# Altium PCB LoggerBoard.PcbDoc
Units mm, origin at the board's own origin, x right, y up, seen from the top; angles counter-clockwise.
Board outline 112.88 x 192.86 mm, 2 copper layers (Top Layer, Bottom Layer); 30 components, 35 nets, 110 pads, 0 vias.
Unrouted connection lines stored in the file: 45.
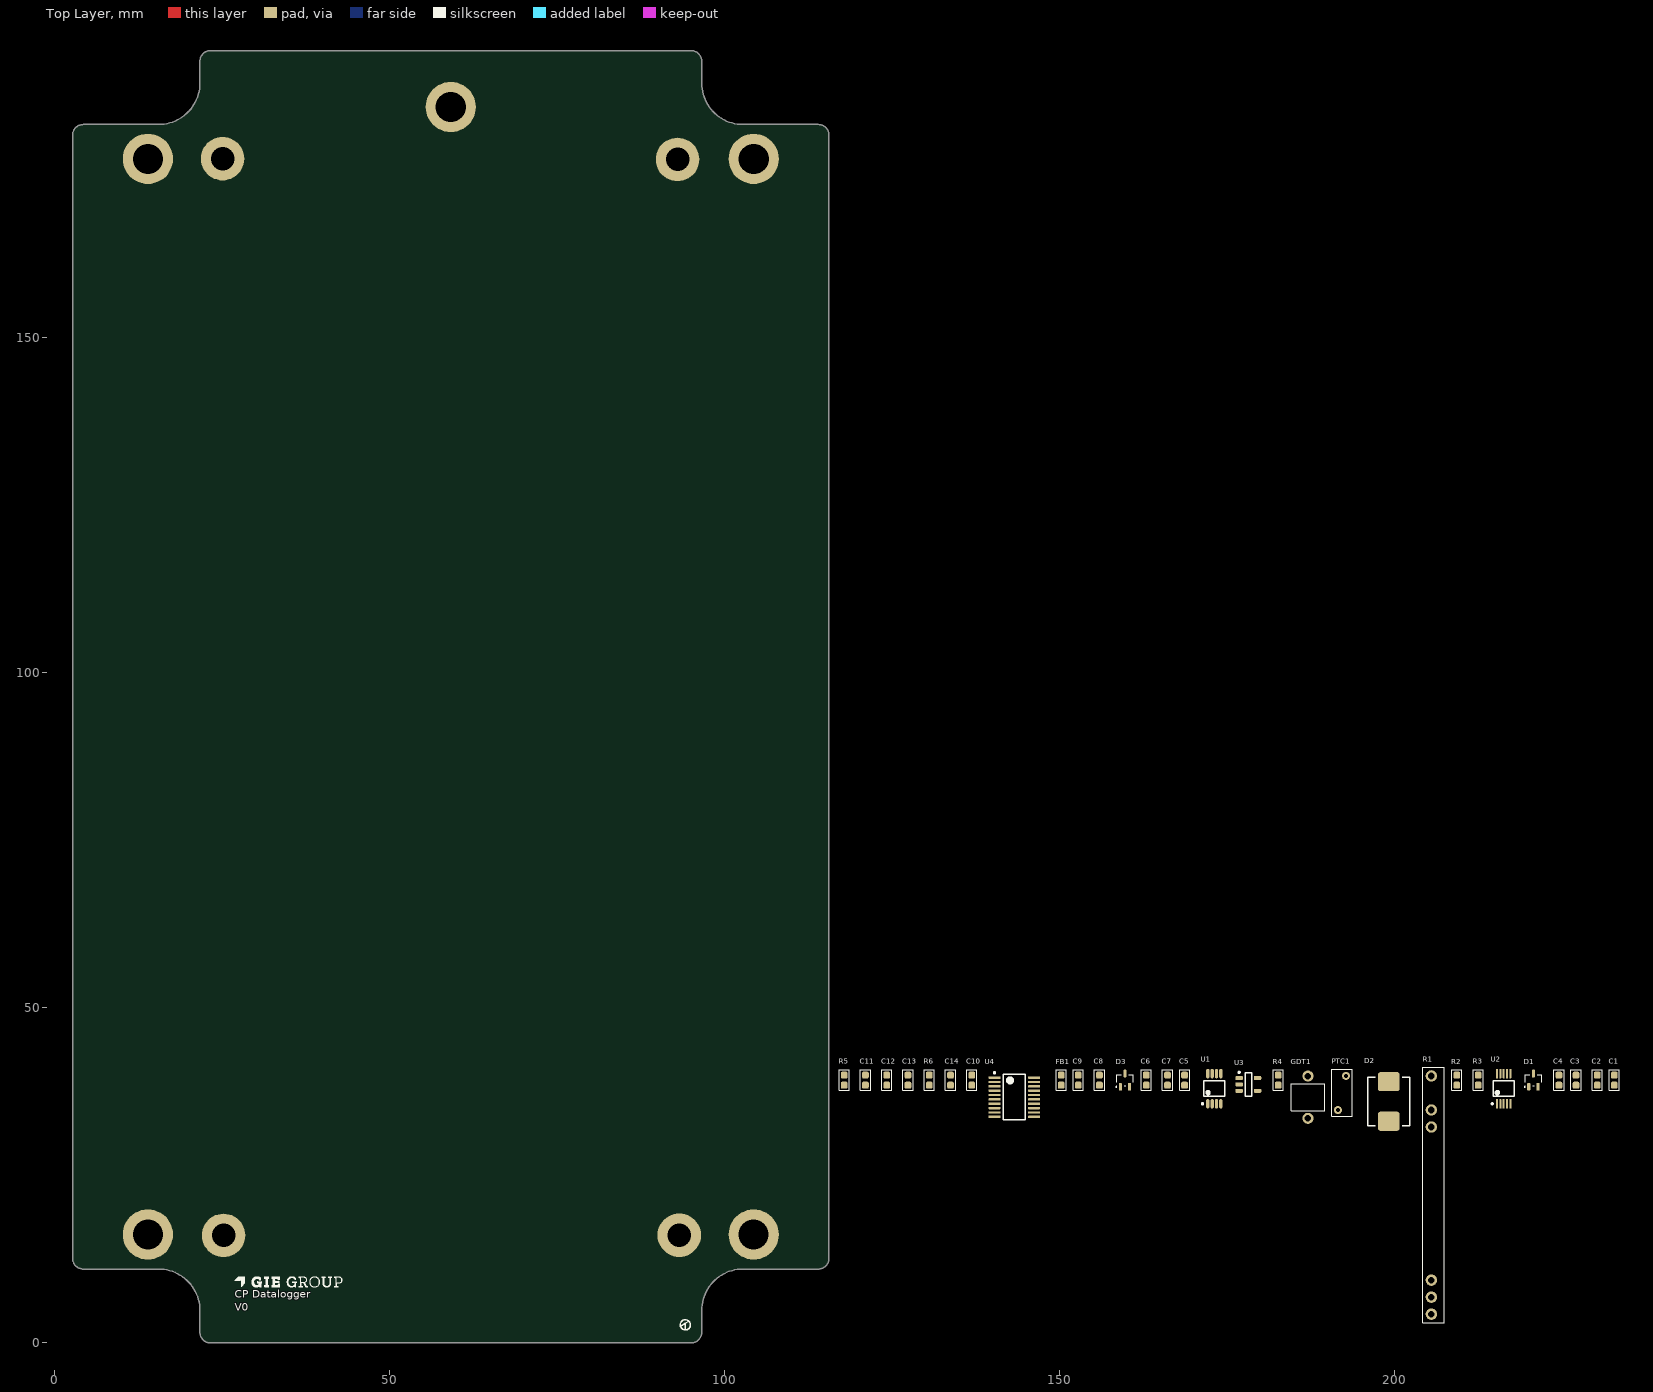
[diagram p0: Top Layer view]
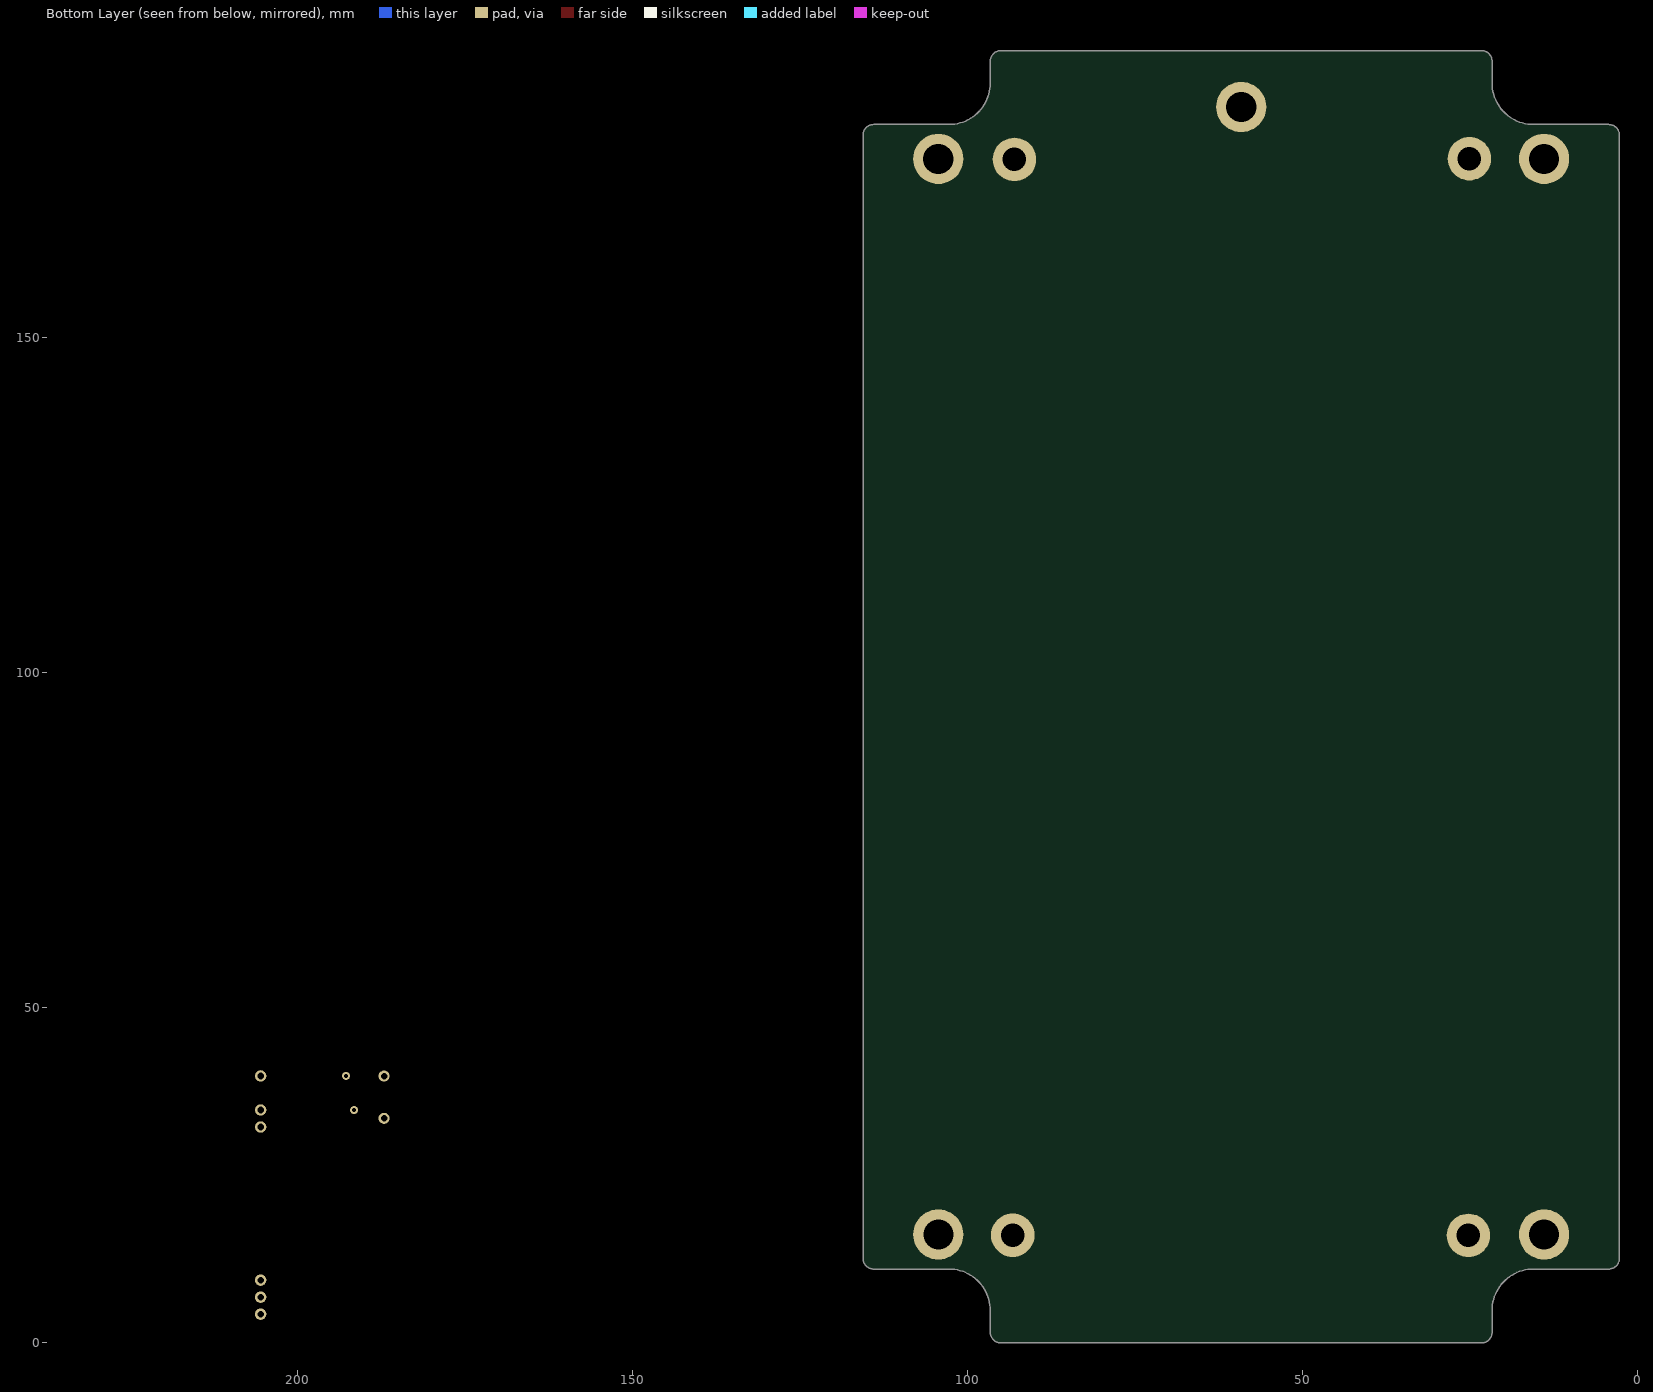
[diagram p1: Bottom Layer view, seen from below]

## Layer stack, top to bottom
Top Solder: solder mask 0.0102, Solder Resist, Dk 3.5
Top Layer: signal copper 0.0356
Dielectric 1: dielectric 0.32, FR-4, Dk 4.8
Bottom Layer: signal copper 0.0356
Bottom Solder: solder mask 0.0102, Solder Resist, Dk 3.5

## Board outline
96.616,1.6 96.615,4.854 cw(c102.785,4.854) 102.785,11.024 114.015,11.025 ccw(c114.015,12.625) 115.615,12.625 115.615,180.235 ccw(c114.015,180.235) 114.015,181.835 102.785,181.836 cw(c102.785,188.006) 96.615,188.006 96.615,191.26 96.616,191.26 ccw(c95.016,191.26) 95.016,192.86 23.335,192.86 ccw(c23.335,191.26) 21.735,191.26 21.735,188.006 cw(c15.565,188.006) 15.565,181.836 4.335,181.835 ccw(c4.335,180.235) 2.735,180.235 2.735,12.625 ccw(c4.335,12.625) 4.335,11.025 15.565,11.024 cw(c15.565,4.854) 21.735,4.854 21.735,1.6 ccw(c23.335,1.6) 23.335,0 95.016,0 ccw(c95.016,1.6)

## Design rules (kind name [scope] priority, off if disabled: settings)
Clearance [All] p1: gap=0.254 ignorepadtopadclearanceinfootprint=FALSE except(0: Arc-Hole Track-Hole SMDPad-Hole THPad-Hole Via-Hole Fill-Hole Poly-Hole Region-Hole Text-Hole)
PolygonConnect [All] p1: connectstyle=Relief reliefconductorwidth=0.254 reliefentries=4 polygonreliefangle="90 Angle" airgapwidth=0.254
RoomDefinition "CH1 ISOLATION" [InComponentClass('CH1 ISOLATION')] p1: confinementstyle=ConfineIn formatcopy=TRUE lockcomponents=FALSE outline -25,-81.44 25.8,-81.44 25.8,-56.04 -25,-56.04
RoomDefinition "CH1 INPUT" [InComponentClass('CH1 INPUT')] p2: confinementstyle=ConfineIn formatcopy=TRUE lockcomponents=FALSE outline 116.605,2.38 234.08,2.38 234.08,43.02 116.605,43.02
RoutingVias [All] p1: holewidth=0.711 width=1.27 viastyle="Through Hole" minholewidth=0.711 minwidth=1.27 maxholewidth=0.711 maxwidth=1.27
SolderMaskExpansion [All] p1: expansion=0.102 istentingtop=FALSE
Width [All] p1: maxlimit=0.254 minlimit=0.254 preferedwidth=0.254
30 further rules are at their usual default settings.

## Classes and differential pairs
component class "CH1 ISOLATION": C15 C16 C17 C18 C19 C20 C21 U5 U6 U7

## Components (designator, comment, footprint, x,y, rotation, side; value= is the part's Value field where it differs from the comment)
C1 "C0603C104K5RACAUTO" CAP-0603 232.81,39.21 r90 top value=0.1uF
C2 "C0603C104K5RACAUTO" CAP-0603 230.27,39.21 r90 top value=0.1uF
C3 "C0603C104K5RACAUTO" CAP-0603 227.095,39.21 r90 top value=0.1uF
C4 "C0603C162J5GAC7867" CAP-0603 224.555,39.21 r90 top value=1.6nF
C5 "C0603C161J1GAC7867" CAP-0603 168.675,39.21 r90 top value=750pF
C6 "C0603C162J5GAC7867" CAP-0603 162.96,39.21 r90 top value=1.6nF
C7 "C0603C161J1GAC7867" CAP-0603 166.135,39.21 r90 top value=160pF
C8 "C0603C104K5RACAUTO" CAP-0603 155.975,39.21 r90 top value=0.1uF
C9 "C0603C104K5RACAUTO" CAP-0603 152.8,39.21 r90 top value=0.1uF
C10 "C0603C105M3RAC7867" CAP-0603 136.925,39.21 r90 top value=1.0uF
C11 "C0603C105M3RAC7867" CAP-0603 121.05,39.21 r90 top value=1.0uF
C12 "C0603C105M3RAC7867" CAP-0603 124.225,39.21 r90 top value=1.0uF
C13 "C0603C105M3RAC7867" CAP-0603 127.4,39.21 r90 top value=1.0uF
C14 "C0603C105M3RAC7867" CAP-0603 133.75,39.21 r90 top value=1.0uF
D1 "NSVBAT54WT1G" SOT-323-3 220.745,39.21 r0 top
D2 "1.5SMC130CA" "SMC - BIIDIR" 199.155,36.035 r90 top
D3 "NSVBAT54WT1G" SOT-323-3 159.785,39.21 r0 top
FB1 "Z0603C121GPWZT" IND-0603 150.26,39.21 r90 top value=120@100MHz
GDT1 "CG5145LTR" LITTLELFUSE-CG5XXXLTR 187.09,36.67 r90 top
PTC1 "72R020XPR" LITTLELFUSE-72R020X 192.17,37.305 r90 top
R1 "HVD5-B20M-050-05" "CADDOCK - HVD5-B20M-050-05" 205.505,9.365 r90 top
R2 "RC0603FR-07113KL" RES-0603 209.315,39.21 r90 top value=113K
R3 "RC0603FR-07887KL" RES-0603 212.49,39.21 r90 top value=887K
R4 "RC0603FR-07100KL" RES-0603 182.645,39.21 r90 top value=100K
R5 "RC0603FR-071ML" RES-0603 117.875,39.21 r90 top value=1.00M
R6 "RC0603FR-071ML" RES-0603 130.575,39.21 r90 top value=1.00M
U1 "ADA4051-2ARMZ" MSOP8 173.12,37.94 r90 top
U2 "AD8253ARMZ" MSOP10 216.3,37.94 r90 top
U3 "AD8638ARJZ" SOT23-5 178.2,38.575 r0 top
U4 "ADS1259BIPW" TSSOP20 143.275,36.67 r0 top

## Footprints (in the part's own frame and the unit in brackets; to place one, negate y for a bottom-side part, rotate by r counter-clockwise, add the part's x,y. Pads: shape width x height; smd on the part's side, far side on the other; paste and mask are expansions set on the pad)
"CADDOCK - HVD5-B20M-050-05" [mm]
  round 1.7 hole 1: 1(-5.08,0) 2(-2.54,0) 3(0,0) 4(22.86,0) 5(25.4,0) 6(30.48,0)
  silkscreen extent -6.35,-1.91 31.75,1.27
CAP-0603 [mm] "Chip Capacitor 0603"
  rrect50% 1.05x1 smd: 1(-0.75,0) 2(0.75,0)
  silkscreen extent -1.52,-0.76 1.52,0.75, body extent -0.88,-0.48 0.87,0.47, height 0.6
IND-0603 [mm] "Chip Inductor 0603"
  rrect50% 1.05x1 smd: 1(-0.75,0) 2(0.75,0)
  silkscreen extent -1.52,-0.76 1.52,0.75, body extent -0.88,-0.48 0.87,0.47, height 0.6
LITTLELFUSE-72R020X [mm]
  round 1.2 hole 0.6: 1(-2.55,0.6) 2(2.55,-0.6)
  silkscreen extent -3.5,-1.5 3.5,1.5
LITTLELFUSE-CG5XXXLTR [mm]
  round 1.651 hole 0.95: 1(-3.15,0) 2(3.15,0)
  silkscreen extent -2,-2.54 2,2.5
MSOP8 [mm]
  oval 1.4x0.5 smd: 1(-2.25,0.975) 2(-2.25,0.325) 3(-2.25,-0.325) 4(-2.25,-0.975) 5(2.25,-0.975) 6(2.25,-0.325) 7(2.25,0.325) 8(2.25,0.975)
  silkscreen extent -2.37,-1.55 1.15,1.9, body extent -1.55,-1.55 1.55,1.55, height 2.65
MSOP10 [mm]
  rrect50% 1.4x0.3 smd: 1(-2.25,1) 2(-2.25,0.5) 3(-2.25,0) 4(-2.25,-0.5) 5(-2.25,-1) 6(2.25,-1) 7(2.25,-0.5) 8(2.25,0) 9(2.25,0.5) 10(2.25,1)
  silkscreen extent -2.37,-1.55 1.15,1.82, body extent -1.55,-1.55 1.55,1.55, height 2.65
RES-0603 [mm] "Chip Resistor 0603"
  rrect50% 1.05x1 smd: 1(-0.75,0) 2(0.75,0)
  silkscreen extent -1.52,-0.76 1.52,0.75, body extent -0.88,-0.48 0.87,0.47, height 0.6
"SMC - BIIDIR" [mm]
  rrect25% 2.85x3.2 smd: 1(-2.95,0) 2(2.95,0)
  silkscreen extent -3.6,-3.15 3.6,3.15, body extent -3.95,-2.95 4,2.95, height 2.3
SOT23-5 [mm] "SOT23, 5-Leads, Body 3.13x2.80mm, Pitch 0.95mm, IPC Medium Density"
  rrect50% 1.1x0.6 smd: 1(-1.375,0.95) 2(-1.375,0) 3(-1.375,-0.95) 4(1.375,-0.95) 5(1.375,0.95)
  silkscreen extent -1.5,-1.75 0.5,1.92, body extent -1.5,-1.75 1.5,1.75, height 1.45
SOT-323-3 [mil]
  rrect50% 18x45 smd paste+0 mask+0: 1(-27.5,-39) 2(27.5,-39) 3(0,39)
  silkscreen extent -53,-43 48,32, body extent 0,0 0,0
TSSOP20 [mm] "TSOP, 14-Leads, Body 5.1x4.5mm (max), Pitch 0.65mm, IPC Low Density"
  rrect50% 1.8x0.35 smd: 1(-2.95,2.925) 2(-2.95,2.275) 3(-2.95,1.625) 4(-2.95,0.975) 5(-2.95,0.325) 6(-2.95,-0.325) 7(-2.95,-0.975) 8(-2.95,-1.625) 9(-2.95,-2.275) 10(-2.95,-2.925) 11(2.95,-2.925) 12(2.95,-2.275) 13(2.95,-1.625) 14(2.95,-0.975) 15(2.95,-0.325) 16(2.95,0.325) 17(2.95,0.975) 18(2.95,1.625) 19(2.95,2.275) 20(2.95,2.925)
  silkscreen extent -3.07,-3.39 1.65,3.77, body extent -3.15,-3.35 3.13,3.15, height 1.09

## Part data
C1 C2 C3 C8 C9: "CAP CER 0.1uF 50V X7R 0603", Manufacturer=Kemet, Supplier Part Number 1=399-6856-1-ND, Tolerance=10%, Voltage=50, PartNumber=C0603C104K5RACAUTO, Supplier 1=Digi-Key, Supplier 2=Mouser, Supplier Part Number 2=80-C0603C104K5RAUTO
C4 C6: "CAP CER 1600´pF 50V C0G 0603", Manufacturer=Kemet, Supplier Part Number 1=399-15368-1-ND, Tolerance=5%, Voltage=50, PartNumber=C0603C162J5GAC7867, Supplier 1=Digi-Key, Supplier 2=Mouser, Supplier Part Number 2=80-C0603C162J5G
C5: library part C0603C751J5GAC7867, "CAP CER 750´pF 50V C0G 0603", Manufacturer=Kemet, Supplier Part Number 1=399-C0603C751J5GAC7867CT-ND, Tolerance=5%, Voltage=50V, PartNumber=C0603C161J1GAC7867, Supplier 1=Digi-Key, Supplier 2=Mouser, Supplier Part Number 2=80-C0603C751J5G
C7: "CAP CER 160 pF 100V C0G 0603", Manufacturer=Kemet, Supplier Part Number 1=399-15367-1-ND, Tolerance=5%, Voltage=100V, PartNumber=C0603C161J1GAC7867, Supplier 1=Digi-Key
C10 C11 C12 C13 C14: "CAP CER 1uF 25V X7R 0603", Manufacturer=Kemet, Supplier Part Number 1=399-C0603C105M3RAC7867CT-ND, Tolerance=20%, Voltage=25, PartNumber=C0603C105M3RAC7867, Supplier 1=Digi-Key, Supplier 2=Mouser, Supplier Part Number 2=80-C0603C105M3R
D1 D3: "Schottky Diode 30V 200mA SOT323", Manufacturer=OnSemiconductor, Supplier Part Number 1=NSVBAT54WT1GOSDKR-ND, IF(avg)=0.2A, PartNumber=NSVBAT54WT1G, Supplier 1=Digi-Key, Supplier 2=Mouser, Supplier Part Number 2=863-NSVBAT54WT1G, VR(rms)=30V
D2: "TVS Diode 1.5kW 130V 5% Bi-Directional", Manufacturer=Littelfuse, Power=1500W, Supplier Part Number 1=1.5SMC130CACT-ND, Voltage=130V, PartNumber=1.5SMC130CA, Supplier 1=Digi-Key, Supplier 2=Mouser, Supplier Part Number 2=576-1.5SMC130CA
FB1: "Ferrite Bead 120Ohms 900mA 25% DCR=130m", Manufacturer=Kemet, Supplier Part Number 1=399-Z0603C121GPWZTCT-ND, PartNumber=Z0603C121GPWZT, Supplier 1=Digi-Key, Supplier 2=Mouser, Supplier Part Number 2=80-Z0603C121GPWZT
GDT1: "Gas Discharge Tube 145V", Manufacturer=Littelfuse, Supplier Part Number 1=CG5145LTR-ND, Voltage=145V, PartNumber=CG5145LTR, Supplier 1=Digi-Key, Supplier 2=Mouser, Supplier Part Number 2=576-CG5145LTR
PTC1: "PTC Polyfuse Radial 72V 0.2A", Manufacturer=Littlelfuse, Supplier Part Number 1=72R020XPRCT-ND, Voltage=72V, Ihold=0.2A, Itrip=0.4A, PartNumber=72R020XPR, Supplier 1=Digi-Key, Supplier 2=Mouser, Supplier Part Number 2=576-72R020XPR
R1: "20M ohm 0.05% 5ppm Voltage Divider", Manufacturer=Caddock, Supplier Part Number 1=HVD5-B20M-050-05-ND, Tolerance=0.05%, PartNumber=HVD5-B20M-050-05, Ratio=100:1, Supplier 1=Digi-Key, Supplier 2=Mouser, Supplier Part Number 2=684-HVD5-B20M, Thermal=5ppm/°C, Zin=20M
R2: "RES SMD 113K OHM 1% 1/10W 0603", Manufacturer=Yageo, Power=0.1W, Supplier Part Number 1=311-113KHRCT-ND, Tolerance=1%, PartNumber=RC0603FR-07113KL, Supplier 1=Digi-Key, Supplier 2=Mouser, Supplier Part Number 2=603-RC0603FR-07113KL
R3: "RES SMD 887K OHM 1% 1/10W 0603", Manufacturer=Yageo, Power=0.1W, Supplier Part Number 1=311-887KHRCT-ND, Tolerance=1%, PartNumber=RC0603FR-07887KL, Supplier 1=Digi-Key, Supplier 2=Mouser, Supplier Part Number 2=603-RC0603FR-07887KL
R4: "RES SMD 100K OHM 1% 1/10W 0603", Manufacturer=Yageo, Power=0.1W, Supplier Part Number 1=311-100KHRCT-ND, Tolerance=1%, PartNumber=RC0603FR-07100KL, Supplier 1=Digi-Key, Supplier 2=Mouser, Supplier Part Number 2=603-RC0603FR-07100KL
R5 R6: "RES SMD 1M OHM 1% 1/10W 0603", Manufacturer=Yageo, Power=0.1W, Supplier Part Number 1=311-887KHRCT-ND, Tolerance=1%, PartNumber=RC0603FR-071ML, Supplier 1=Digi-Key, Supplier 2=Mouser, Supplier Part Number 2=603-RC0603FR-07887KL
U1: "Dual  Precision Amplifier Micro Power Auto Zero", Manufacturer="Analog Devices", Supplier Part Number 1=505-ADA4051-2ARMZ-ND, PartNumber=ADA4051-2ARMZ, Supplier 1=Digi-Key, Supplier 2=Mouser, Supplier Part Number 2=584-ADA4051-2ARMZ
U2: "Instrumentation Amplifiers High Speed Programmable High Gain In-Amp", Manufacturer="Analog Devices Inc", Supplier Part Number 1=505-AD8253ARMZ-R7DKR-ND, PartNumber=AD8253ARMZ, Supplier 1=Digi-Key, Supplier 2=Mouser, Supplier Part Number 2=584-AD8253ARMZ-R7
U3: "16V Auto-Zero CMOS Amplifier", Manufacturer="Analog Devices", Supplier Part Number 1=505-AD8638ARJZ-REEL7DKR-ND, PartNumber=AD8638ARJZ, Supplier 1=Digi-Key, Supplier 2=Mouser, Supplier Part Number 2=584-AD8638ARJZ-R7
U4: "Analog to Digital Converter 14.4kSPS 24-Bit", Manufacturer="Texas Instruments", Supplier Part Number 1=296-27183-5-ND, PartNumber=ADS1259BIPW, Supplier 1=Digi-Key, Supplier 2=Mouser, Supplier Part Number 2=595-ADS1259BIPW

## Free pads (board coordinates)
  round 7.5 hole 4.5: M1(13.975,16.18) M3(104.375,16.18) M4(104.375,176.695) M5(59.175,184.443) M6(13.975,176.695)
  round 6.5 hole 3.5: S1(25.267,16.051) S2(93.27,16.074) S3(93.012,176.623) S4(25.117,176.728)

## Nets (pads, with @x,y where several pads share a name; then routed paths per layer and width w, separated by ;. In a path a pad name is that pad's centre, name@x,y a point inside that pad or via, vN(x,y) a via of type N, cw(c..) or ccw(c..) an arc to the next point about the centre after c; other vN are vias at no path point)
+3.3V: 
+5V1: C13.2 FB1.2 U4.15
+5VA1: C2.2 C12.2 D1.3 FB1.1 U1.8 U4.20
+9V1: C1.2 C3.2 U2.8 U3.5
-9V1: C8.2 C9.2 U2.3 U2.6 U3.2
CH1-Ref: C11.2 U2.9 U4.16
CH1-Va: C4.1 U1.6 U1.7 U4.1
GND: 
GND1: 
NetC4_2: C4.2 R2.2 R3.1
NetC5_2: C5.2 R1.4 R1.5 U3.3
NetC6_2: C6.2 D1.1 D3.3 R4.2 U1.3
NetC7_2: C7.2 R3.2 U1.5
NetC10_1: C10.1 U4.17
NetC10_2: C10.2 U4.18
NetC14_2: C14.2 U4.13
NetD2_1: D2.1 PTC1.2 R1.1 R1.2 R1.3
NetGDT1_1: GDT1.1 PTC1.1
NetR2_1: R2.1 U1.1 U1.2
NetR4_1: R4.1 U2.7
NetR5_2: R5.2 U4.5
NetR6_2: R6.2 U4.9
NetU2_4: U2.4
NetU2_5: U2.5
NetU2_10: U2.10 U3.1 U3.4
NetU4_4: U4.4
NetU4_6: U4.6
NetU4_7: U4.7
NetU4_8: U4.8
NetU4_10: U4.10
NetU6_2: 
NetU6_3: 
NetU6_4: 
NetU6_5: 
NetU6_6: 
pads on no net: C1.1 C2.1 C3.1 C5.1 C6.1 C7.1 C8.1 C9.1 C11.1 C12.1 C13.1 C14.1 D1.2 D2.2 D3.1 D3.2 GDT1.2 R1.6 R5.1 R6.1 U1.4 U2.1 U2.2 U4.2 U4.3 U4.11 U4.12 U4.14 U4.19

## Silkscreen, mask and mechanical layers (free items; w line width, h text height)
Top Overlay:
  drawing of 13 lines, arcs and shapes, not listed
  text "CP Datalogger / V0" at 26.924,4.318 h2
Mechanical 1:
  lines w0.2: 15.384,181.77 ccw(c15.384,188.12) 21.734,188.12 ; 15.446,181.775 4.335,181.835 ccw(c4.335,180.235) 2.735,180.235 2.735,12.625 ccw(c4.335,12.625) 4.335,11.025 15.565,11.024 cw(c15.565,4.854) 21.735,4.854 21.735,1.6 ccw(c23.335,1.6) 23.335,0 95.016,0 ccw(c95.016,1.6) 96.616,1.6 96.615,4.854 cw(c102.785,4.854) 102.785,11.024 114.015,11.025 ccw(c114.015,12.625) 115.615,12.625 ; 21.735,188.138 21.735,191.26 cw(c23.335,191.26) 23.335,192.86 95.016,192.86 cw(c95.016,191.26) 96.616,191.26 96.615,188.006 ccw(c102.785,188.006) 102.785,181.836 114.015,181.835 cw(c114.015,180.235) 115.615,180.235 115.615,12.65

## Dimensions
23.335,192.86 to 95.016,0 on Mechanical 16
102.785,11.024 to 95.016,0 on Mechanical 16
15.384,188.12 to 15.115,188 on Mechanical 16
4.335,12.625 to -4.55,3.74 on Mechanical 16
21.735,1.6 to 2.735,12.625 on Mechanical 16
115.615,12.65 to 2.735,12.625 on Mechanical 16